# Altium PCB RD.PcbDoc (part 2 of 2)
Units mm, origin at the board's own origin, x right, y up, seen from the top; angles counter-clockwise.
Board outline 101.86 x 119 mm, 4 copper layers (Top Layer, VCC, GND, Bottom Layer); 150 components, 96 nets, 593 pads, 207 vias.
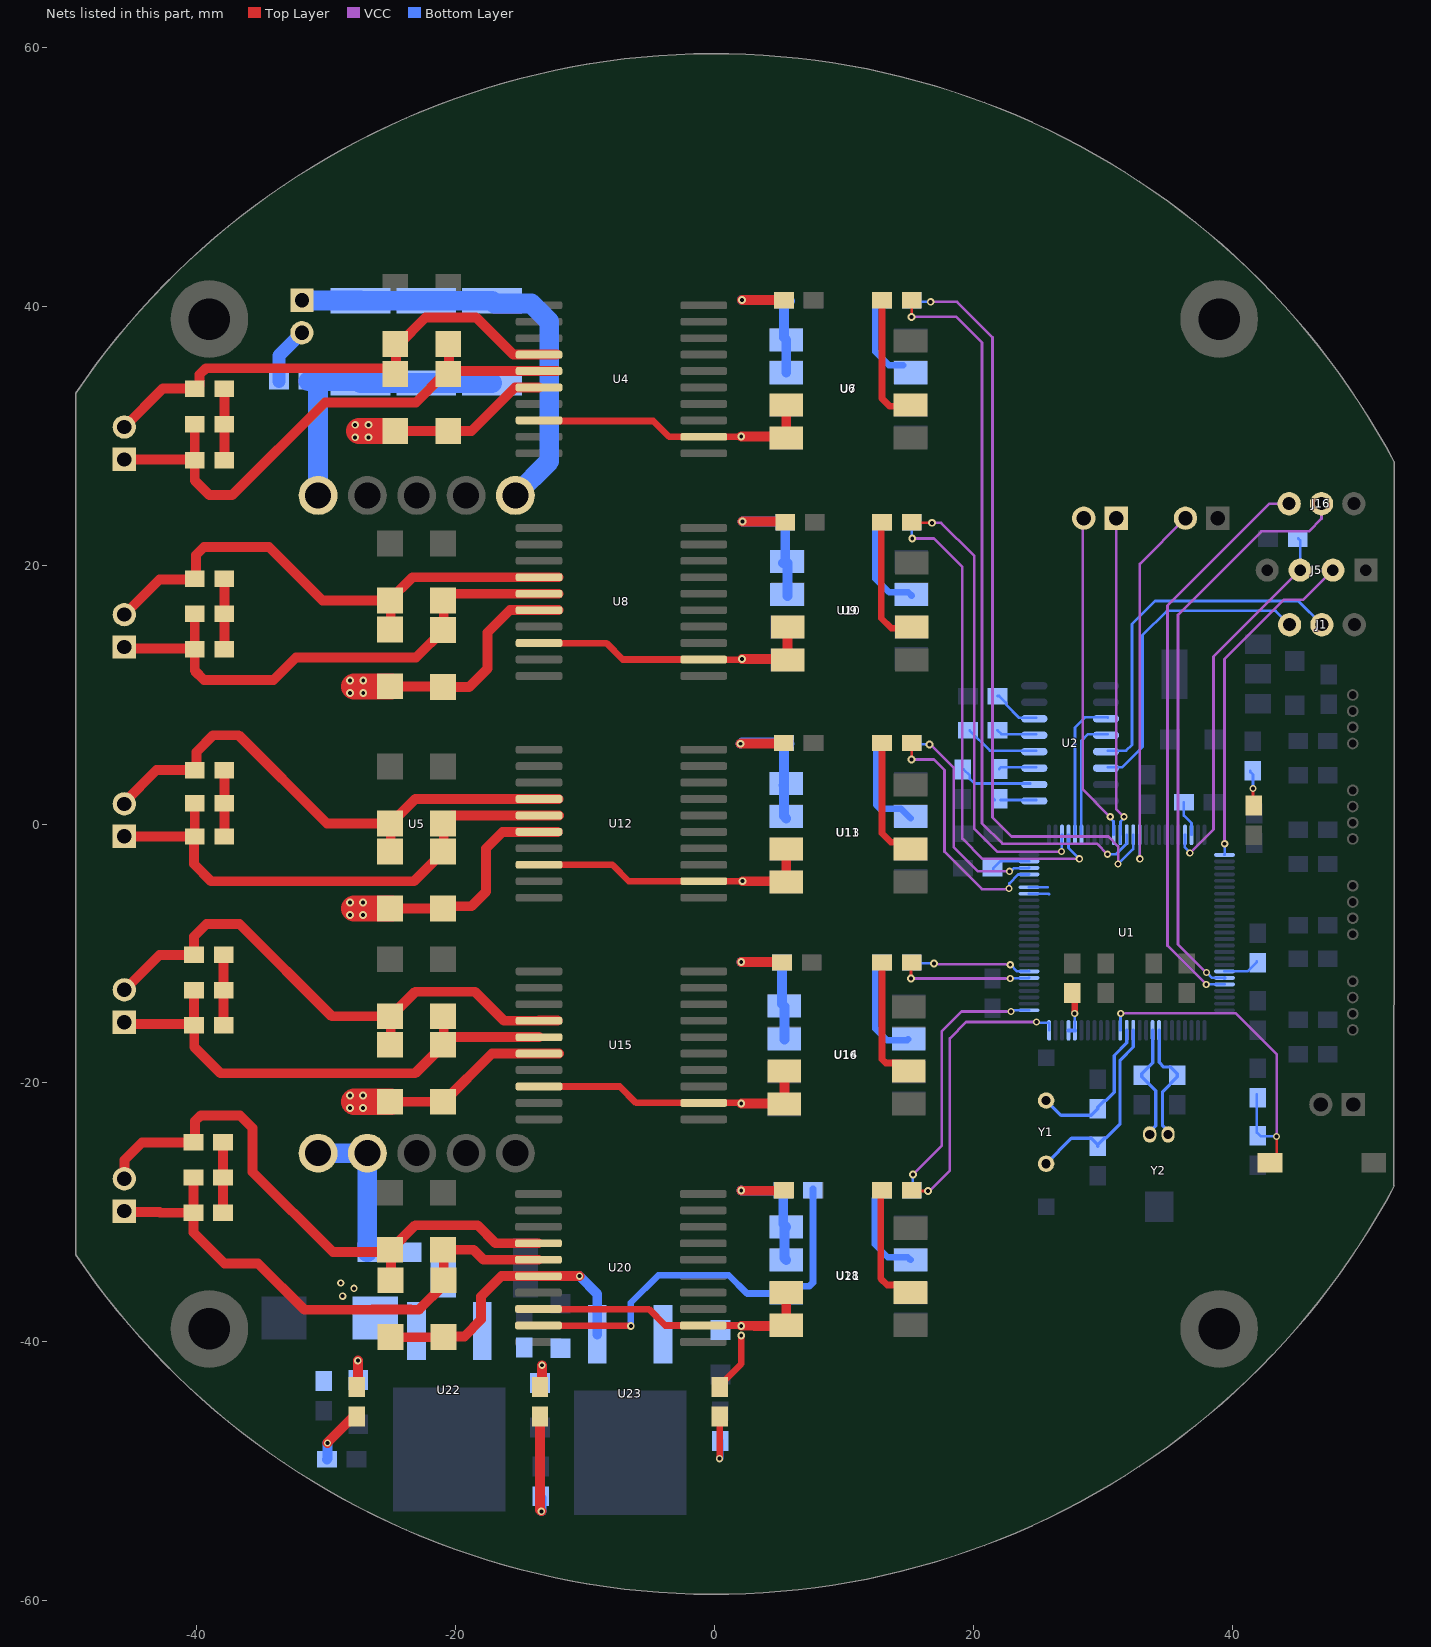
[diagram p4: the nets of this part, all layers, seen from the top]

## Via types
v1: diameter 0.559, hole 0.305, Top Layer to Bottom Layer, 135 vias
v2: diameter 0.61, hole 0.305, Top Layer to Bottom Layer, 72 vias

## Nets (pads, with @x,y where several pads share a name; then routed paths per layer and width w, separated by ;. In a path a pad name is that pad's centre, name@x,y a point inside that pad or via, vN(x,y) a via of type N, cw(c..) or ccw(c..) an arc to the next point about the centre after c; other vN are vias at no path point) (continued)
IN10: R36.2 U20.9 U21.6 | length 32
  Top Layer w0.508: U20.9@-13.581,-38.737 -13.569,-38.749 -6.463,-38.749 v2(-6.452,-38.76)
  Bottom Layer w0.508: v2(-6.452,-38.76) -6.452,-36.982 -4.318,-34.849 1.118,-34.849 2.533,-36.264 U21.6@5.559,-36.264 ; U21.6@5.559,-36.213 6.056,-35.716 7.322,-35.716 7.62,-35.418 R36.2@7.62,-28.16
INPUT1: R13.1 U1.63 | length 57.8
  Top Layer w0.203: v2(15.24,39.167) 15.24,39.965 R13.1@15.54,40.265
  VCC w0.203: v2(15.24,39.167) 18.694,39.167 20.676,37.186 20.676,0.051 22.25,-1.524 29.566,-1.524 v1(30.378,-2.337)
  Bottom Layer w0.203: v1(30.378,-2.337) 31.007,-2.337 31.857,-1.487 U1.63@31.857,-0.837
INPUT2: R16.1 U1.64 | length 59.4
  VCC w0.203: v1(16.713,40.335) 18.745,40.335 21.488,37.592 21.488,0.508 22.962,-0.965 30.429,-0.965 31.191,-1.727 v1(31.191,-3.099)
  Bottom Layer w0.203: R16.1@15.083,40.388 15.135,40.335 v1(16.713,40.335) ; v1(31.191,-3.099) 32.357,-1.933 U1.64@32.357,-0.837
INPUT3: R18.1 U1.53 | length 35.8
  Top Layer w0.203: R18.1@15.184,23.297 15.215,23.266 v2(16.815,23.266)
  VCC w0.203: v2(16.815,23.266) 17.526,23.266 20.066,20.726 20.066,-0.356 21.844,-2.134 v1(26.822,-2.134)
  Bottom Layer w0.203: v1(26.822,-2.134) 26.84,-2.116 26.84,-0.855 U1.53@26.857,-0.837
INPUT4: R21.1 U1.54 | length 38.9
  VCC w0.203: v2(15.291,22.047) 16.967,22.047 19.152,19.863 19.152,-1.118 20.726,-2.692 v1(28.194,-2.692)
  Bottom Layer w0.203: v2@15.24,22.047 R21.1@15.24,23.322 ; U1.54@27.357,-0.837 27.357,-1.855 v1(28.194,-2.692)
INPUT5: R23.1 U1.47 | length 18.9
  Top Layer w0.203: R23.1@15.21,6.257 15.24,6.226 v2(15.24,4.978)
  VCC w0.203: v2(15.24,4.978) 16.967,4.978 17.78,4.166 17.78,-2.132 20.676,-5.028 22.709,-5.028 v1(22.758,-4.978)
  Bottom Layer w0.203: v1(22.758,-4.978) 22.79,-4.946 22.79,-4.591 23.476,-3.906 24.288,-3.906 U1.47@24.307,-3.887
INPUT6: R26.1 U1.48 | length 17
  VCC w0.203: v2(16.612,6.147) 16.713,6.147 18.491,4.369 18.491,-1.778 20.371,-3.658 v1(22.809,-3.658)
  Bottom Layer w0.203: R26.1@15.083,6.257 15.193,6.147 v2(16.612,6.147) ; v1(22.809,-3.658) 22.905,-3.658 23.157,-3.406 24.288,-3.406 U1.48@24.307,-3.387
INPUT7: R28.1 U1.31 | length 10.4
  Top Layer w0.203: v2(15.189,-11.938) R28.1@15.189,-10.724
  VCC w0.203: v2(15.189,-11.938) v1(22.86,-11.938)
  Bottom Layer w0.203: v1(22.86,-11.938) 22.892,-11.906 24.288,-11.906 U1.31@24.307,-11.887
INPUT8: R31.1 U1.32 | length 9.3
  VCC w0.203: v2(16.967,-10.77) 17.018,-10.82 22.809,-10.82 v1(22.86,-10.871)
  Bottom Layer w0.203: R31.1@15.342,-10.724 15.387,-10.77 v2(16.967,-10.77) ; v1(22.86,-10.871) 23.376,-11.387 U1.32@24.307,-11.387 U1.32@24.275,-11.356
INPUT9: R35.1 U1.25 | length 22.5
  Top Layer w0.203: R35.1@15.24,-28.279 15.307,-28.346 v2(16.51,-28.346)
  VCC w0.203: v2@16.624,-28.334 18.186,-26.772 18.186,-16.561 19.456,-15.291 v1(24.892,-15.291)
  Bottom Layer w0.203: v1@24.943,-15.24 25.043,-15.34 25.812,-15.34 25.857,-15.384 U1.25@25.857,-15.937
INPUT10: R37.1 U1.26 | length 20.6
  VCC w0.203: v2(15.342,-27.076) 17.577,-24.841 17.577,-16.002 19.101,-14.478 v1(22.911,-14.478)
  Bottom Layer w0.203: R37.1@15.162,-28.194 15.342,-28.014 v2(15.342,-27.076) ; v1(22.911,-14.478) 23.007,-14.478 23.098,-14.387 U1.26@24.307,-14.387
INPUT_CeTui1: J16.2 U1.95 | length 45.4
  VCC w0.203: v1(38.008,-11.471) 37.989,-11.471 35.814,-9.296 35.814,16.154 42.266,22.606 45.923,22.606 46.899,23.582 J16.2@46.899,24.74
  Bottom Layer w0.203: v1(38.008,-11.471) 38.039,-11.471 38.456,-11.887 U1.95@39.407,-11.887
  Bottom Layer w0.305: U1.95@39.404,-11.885 U1.95@39.407,-11.887
INPUT_CeTui2: J16.3 U1.96 | length 44.5
  VCC w0.203: v1(37.998,-12.395) 35.001,-9.398 35.001,16.866 42.875,24.74 J16.3@44.348,24.74
  Bottom Layer w0.203: v1@38.049,-12.395 38.053,-12.391 39.403,-12.391 U1.96@39.407,-12.387
INPUT_CeTui3: U1.44 | length 1.6
  Bottom Layer w0.203: U1.44@24.307,-5.387 25.809,-5.387 25.857,-5.436
INPUT_CeTui4: U1.45 | length 1.5
  Bottom Layer w0.203: U1.45@24.307,-4.887 24.317,-4.877 25.756,-4.877
INPUT_DuoJi1: J18.2 U1.61 | length 25.4
  VCC w0.203: J18.2@28.448,23.52 28.448,2.692 v1(30.582,0.559)
  Bottom Layer w0.203: v1(30.582,0.559) 30.582,0.463 30.838,0.206 30.838,-0.819 U1.61@30.857,-0.837
INPUT_DuoJi2: J18.1 U1.62 | length 25.5
  VCC w0.203: J18.1@31.039,23.622 31.039,1.168 v1(31.648,0.559)
  Bottom Layer w0.203: U1.62@31.357,-1.487 U1.62@31.357,-0.837 31.375,-0.819 31.375,0.189 31.648,0.463 v1(31.648,0.559)
INPUT_ZhuTui: J17.2 U1.65 | length 29.6
  VCC w0.203: v1(32.868,-2.692) 32.868,20.097 J17.2@36.393,23.622
  Bottom Layer w0.203: U1.65@32.857,-0.837 32.862,-0.843 32.862,-2.687 v1(32.868,-2.692)
NetC8_2: C8.2 U1.49 | length 3.1
  Bottom Layer w0.203: C8.2@21.539,-3.505 21.539,-3.421 22.073,-2.887 U1.49@24.307,-2.887
NetC9_2: C9.2 U1.73 | length 2.8
  Bottom Layer w0.203: C9.2@36.271,1.676 36.271,0.66 36.857,0.075 U1.73@36.857,-0.837
NetC11_1: C11.1 U2.3 | length 2.9
  Bottom Layer w0.203: C11.1@22.005,4.243 22.158,4.396 U2.3@24.853,4.396
NetC11_2: C11.2 U2.1 | length 2.9
  Bottom Layer w0.203: C11.2@21.548,1.957 C11.2@21.649,1.856 ; C11.2@22.106,1.856 U2.1@24.853,1.856
NetC14_1: C14.1 U2.2 | length 5.7
  Bottom Layer w0.203: C14.1@19.253,4.216 19.736,3.734 19.736,3.48 20.089,3.126 U2.2@24.396,3.126
NetC19_1: C19.1 U2.5 | length 3.1
  Bottom Layer w0.203: C19.1@21.878,7.241 22.182,6.936 U2.5@24.853,6.936
NetC19_2: C19.2 U2.4 | length 5.8
  Bottom Layer w0.203: C19.2@19.719,7.241 21.293,5.666 U2.4@24.853,5.666
NetC20_2: C20.2 U2.6 | length 3.7
  Bottom Layer w0.203: C20.2@21.878,9.882 22.005,9.882 22.538,9.349 22.538,9.222 23.554,8.206 U2.6@24.853,8.206
NetC23_1: C23.1 C24.1 C25.1 F1.2 U5.1 | length 22.3
  Bottom Layer w1.524: F1.2@-31.344,34.188 -27.457,34.188 C25.1@-27.33,34.061 C24.1@-22.25,34.061 C23.1@-17.17,34.061 ; U5.1@-30.607,25.375 -30.607,33.452
NetC23_2: C23.2 C24.2 C25.2 J9.1 U5.5 | length 34.3
  Bottom Layer w1.524: J9.1@-31.852,40.447 -31.834,40.429 -27.348,40.429 C25.2@-27.33,40.411 C24.2@-22.25,40.411 C23.2@-17.17,40.411 -16.957,40.198 -14.138,40.198 -12.751,38.811 -12.751,28.021 -15.367,25.405 U5.5@-15.367,25.375
NetDS1_2: DS1.2 DS2.1 R14.1 | length 5.6
  Top Layer w0.762: DS1.2@-37.897,28.042 DS1.2@-37.846,28.092 DS2.1@-37.846,30.861 R14.1@-37.846,33.63
NetDS3_2: DS3.2 DS4.1 R19.1 | length 5.5
  Top Layer w0.762: R19.1@-37.897,18.898 -37.846,18.847 DS4.1@-37.846,16.231 DS3.2@-37.846,13.513 ; R19.1@-37.744,18.898 R19.1@-37.668,18.821
NetDS5_2: DS5.2 DS6.1 R25.1 | length 5.2
  Top Layer w0.762: DS5.2@-37.897,-1.016 DS5.2@-37.846,-0.965 DS6.1@-37.846,1.6 R25.1@-37.846,4.166
NetDS7_2: DS7.2 DS8.1 R32.1 | length 5.4
  Top Layer w0.762: DS7.2@-37.897,-15.494 DS8.1@-37.897,-12.827 R32.1@-37.897,-10.109
NetDS9_2: DS9.2 DS10.1 R38.1 | length 5.5
  Top Layer w0.762: DS9.2@-37.948,-30.023 DS10.1@-37.948,-27.305 -37.948,-24.638 R38.1@-37.846,-24.536
NetF1_1: F1.1 J9.2 | length 4.5
  Bottom Layer w1.016: F1.1@-33.63,34.188 -33.63,36.17 J9.2@-31.852,37.948
NetF2_1: F2.1 U5.9 U5.10 | length 11.5
  Bottom Layer w1.524: U5.10@-30.607,-25.425 U5.9@-26.797,-25.425 F2.1@-26.797,-33.071
NetLED1_1: LED1.1 R4.1 | length 3.4
  Top Layer w0.203: LED1.1@41.554,0.813 41.554,1.219 41.605,1.27 v1(41.605,2.743)
  Bottom Layer w0.203: R4.1@41.402,4.115 41.402,4.013 41.605,3.81 v1(41.605,2.743)
NetLED2_2: LED2.2 R29.1 | length 4.6
  Top Layer w0.762: v1(-29.87,-47.803) -29.87,-47.777 -27.635,-45.542 LED2.2@-27.635,-45.415
  Bottom Layer w0.762: R29.1@-29.921,-49.073 -29.87,-49.022 v1(-29.87,-47.803)
NetLED3_2: LED3.2 R41.1 | length 8.5
  Top Layer w0.762: LED3.2@-13.462,-45.771 -13.462,-52.984 v1(-13.36,-53.086)
  Bottom Layer w0.762: R41.1@-13.462,-51.968 -13.36,-52.07 v1(-13.36,-53.086)
NetLED4_2: LED4.2 R42.1 | length 4.6
  Top Layer w0.508: v1(0.406,-49.022) LED4.2@0.406,-45.771
  Bottom Layer w0.508: v1(0.406,-49.022) 0.406,-49.008 0.445,-48.97 R42.1@0.445,-47.65
NetR2_1: R2.1 U1.94 | length 2.8
  Bottom Layer w0.203: U1.94@39.407,-11.387 41.165,-11.387 41.91,-10.643 R2.1@41.91,-10.617
NetR13_2: R13.2 U6.2 | length 10.1
  Top Layer w0.508: R13.2@12.954,40.438 12.954,32.868 13.564,32.258 15.065,32.258 U6.2@15.159,32.352
NetR16_2: R16.2 U7.2 | length 6.8
  Bottom Layer w0.508: R16.2@12.954,40.438 12.827,40.438 12.446,40.057 12.446,36.474 13.487,35.433 U7.2@14.581,35.433
NetR18_2: R18.2 U9.2 | length 10.1
  Top Layer w0.508: R18.2@12.898,23.297 12.898,15.898 13.665,15.131 U9.2@15.261,15.131
NetR21_2: R21.2 U10.2 | length 8
  Bottom Layer w0.508: R21.2@12.954,23.322 12.827,23.322 12.446,22.941 12.446,18.948 13.497,17.897 14.984,17.897 U10.2@15.261,17.62
NetR23_2: R23.2 U11.2 | length 9.7
  Top Layer w0.508: R23.2@12.954,6.257 12.954,-0.711 13.646,-1.403 14.523,-1.403 U11.2@15.159,-2.039
NetR26_2: R26.2 U13.2 | length 8.1
  Bottom Layer w0.508: R26.2@12.954,6.257 12.878,6.257 12.497,5.876 12.497,1.489 12.794,1.192 14.405,1.192 U13.2@15.16,0.437
NetR28_2: R28.2 U14.2 | length 9.9
  Top Layer w0.508: R28.2@12.954,-10.699 12.954,-18.166 13.252,-18.463 14.379,-18.463 U14.2@15.015,-19.099
NetR31_2: R31.2 U16.2 | length 8.3
  Bottom Layer w0.508: R31.2@12.954,-10.699 12.446,-11.207 12.446,-15.799 13.346,-16.699 14.899,-16.699 U16.2@14.986,-16.612
NetR35_2: R35.2 U18.2 | length 9.7
  Top Layer w0.508: R35.2@12.848,-28.143 12.848,-35.098 13.36,-35.611 14.696,-35.611 U18.2@15.21,-36.124
NetR37_2: R37.2 U21.2 | length 7.8
  Bottom Layer w0.508: R37.2@12.954,-28.279 12.827,-28.279 12.446,-28.66 12.446,-28.907 12.395,-28.958 12.395,-32.461 13.395,-33.461 14.947,-33.461 U21.2@15.159,-33.673
OSC32IN: C17.2 U1.8 Y2.1 | length 9.6
  Bottom Layer w0.254: U1.8@34.357,-15.937 34.357,-18.406 34.722,-18.771 35.255,-18.771 35.763,-19.279 C17.2@35.763,-19.406 35.763,-19.533 34.62,-20.676 34.62,-23.321 35.052,-23.753 Y2.1@35.052,-23.978
OSC32OUT: C18.2 U1.9 Y2.2 | length 9
  Bottom Layer w0.254: Y2.2@33.63,-23.978 33.63,-23.778 34.087,-23.321 34.087,-20.599 33.02,-19.533 C18.2@33.02,-19.406 33.02,-19.279 33.857,-18.442 U1.9@33.857,-15.937
OSCIN: C15.2 U1.12 Y1.1 | length 15.3
  Bottom Layer w0.254: Y1.1@25.629,-26.241 27.588,-24.282 29.108,-24.282 29.616,-24.79 C15.2@29.616,-24.892 29.616,-24.765 30.124,-24.257 30.251,-24.257 31.344,-23.165 31.344,-18.237 32.357,-17.224 U1.12@32.357,-15.937
OSCOUT: C16.2 U1.13 Y1.2 | length 11.7
  Bottom Layer w0.254: Y1.2@25.629,-21.361 26.772,-22.504 29.108,-22.504 C16.2@29.616,-21.996 29.616,-21.869 30.124,-21.361 30.251,-21.361 30.886,-20.726 30.886,-17.882 31.857,-16.911 U1.13@31.857,-15.937
OUT1: D1.2 D3.1 J10.2 R14.2 U4.4 | length 39.8
  Top Layer w0.762: J10.2@-45.568,30.663 -42.601,33.63 R14.2@-40.513,33.63 ; R14.2@-40.132,33.63 -40.005,33.63 -39.751,33.884 -39.751,34.722 -39.268,35.204 -25.029,35.204 -24.587,34.763 D3.1@-24.587,37.069 ; D3.1@-24.406,37.018 -22.307,39.116 -18.39,39.116 -15.529,36.255 U4.4@-13.542,36.255 U4.4@-12.141,36.255
OUT2: D2.2 D4.1 DS1.1 DS2.2 J10.1 U4.5 | length 43.4
  Top Layer w0.762: J10.1@-45.568,28.163 DS1.1@-40.372,28.163 ; DS1.1@-40.132,28.092 -40.132,26.518 -39.014,25.4 -37.238,25.4 -30.075,32.563 -23.049,32.563 D2.2@-20.9,34.712 ; DS2.2@-40.132,30.861 -40.132,28.143 DS1.1@-40.081,28.092 ; D4.1@-20.9,36.685 D4.1@-20.523,37.062 ; D2.2@-20.555,34.985 U4.5@-13.542,34.985 U4.5@-12.141,34.985 ; D2.2@-20.494,35.382 D4.1@-20.494,36.736
OUT3: D5.2 D7.1 J11.2 R19.2 U8.4 | length 41.6
  Top Layer w0.762: J11.2@-45.568,16.172 -42.842,18.898 -40.03,18.898 -40.03,20.777 -39.421,21.387 -34.392,21.387 -30.26,17.256 D7.1@-25.125,17.256 ; D5.2@-24.994,15.037 -24.994,17.256 D7.1@-25.125,17.256 ; U8.4@-12.04,19.055 U8.4@-13.542,19.055 -23.325,19.055 D7.1@-25.125,17.256
OUT4: D6.2 D8.1 DS3.1 DS4.2 J11.1 U8.5 | length 41.7
  Top Layer w0.508: D6.2@-21.031,15.342 D6.2@-21.002,15.371
  Top Layer w0.762: J11.1@-45.568,13.673 -45.448,13.553 -40.731,13.553 DS3.1@-40.564,13.721 ; DS4.2@-40.132,16.231 -40.132,11.836 -39.421,11.125 -34.036,11.125 -32.309,12.852 -23.034,12.852 -20.9,14.986 D8.1@-20.9,17.256 ; D8.1@-20.828,17.785 U8.5@-13.542,17.785 U8.5@-12.04,17.785
OUT5: D9.2 D11.1 J12.2 R25.2 U12.4 | length 42.3
  Top Layer w0.762: J12.2@-45.568,1.682 -43.084,4.166 -40.005,4.166 -40.005,5.563 -38.71,6.858 -36.728,6.858 -29.905,0.034 D11.1@-24.994,0.034 ; D9.2@-24.994,-2.134 D11.1@-24.994,0.034 ; U12.4@-12.04,1.93 U12.4@-13.542,1.93 -23.098,1.93 D11.1@-24.994,0.034
OUT6: D10.2 D12.1 DS5.1 DS6.2 J12.1 U12.5 | length 42.1
  Top Layer w0.762: J12.1@-45.553,-0.96 DS5.1@-40.336,-0.96 ; DS5.1@-40.132,-0.965 DS6.2@-40.132,1.6 DS6.2@-40.132,1.626 ; DS5.1@-40.081,-1.016 -40.183,-1.118 -40.183,-3.099 -38.862,-4.42 -23.186,-4.42 -20.9,-2.134 D12.1@-20.9,-0.016 ; D12.1@-20.9,0.034 D12.1@-20.9,-0.016 ; U12.5@-11.989,0.66 U12.5@-13.542,0.66 -20.224,0.66 D12.1@-20.9,-0.016
OUT7: D13.2 D15.1 J14.2 R32.2 U15.4 | length 43.3
  Top Layer w0.762: J14.2@-45.549,-12.791 J14.2@-45.568,-12.809 -42.868,-10.109 R32.2@-40.183,-10.109 -40.183,-8.687 -39.218,-7.722 -36.678,-7.722 -29.549,-14.85 D15.1@-24.994,-14.85 ; D13.2@-24.994,-17.053 D15.1@-24.994,-14.85 ; U15.4@-12.09,-15.189 -13.536,-15.189 U15.4@-13.542,-15.195 -16.251,-15.195 -18.491,-12.954 -23.098,-12.954 D15.1@-24.994,-14.85
OUT8: D14.2 D16.1 DS7.1 DS8.2 J14.1 U15.5 | length 40.2
  Top Layer w0.762: J14.1@-45.568,-15.309 -45.424,-15.452 DS7.1@-40.485,-15.452 ; DS8.2@-40.183,-12.827 -40.183,-15.788 -40.172,-15.799 -40.172,-17.232 -38.151,-19.253 -34.995,-19.253 ; -34.849,-19.253 -23.1,-19.253 -20.9,-17.053 D16.1@-20.9,-14.85 ; D14.2@-20.875,-17.058 -20.281,-16.465 U15.5@-13.542,-16.465
OUT9: D18.2 D20.1 J15.2 R38.2 U20.4 | length 45.7
  Top Layer w0.762: J15.2@-45.568,-27.401 J15.2@-45.568,-27.178 ; -45.568,-25.959 J15.2@-45.568,-27.178 ; -45.517,-25.908 -44.196,-24.587 R38.2@-40.234,-24.587 ; J15.2@-45.415,-27.33 J15.2@-45.568,-27.178 ; R38.2@-40.117,-24.486 -40.117,-22.951 -39.671,-22.504 -36.627,-22.504 -35.662,-23.47 -35.662,-26.873 -29.464,-33.071 -24.943,-33.071 -24.968,-33.096 -24.968,-35.214 D18.2@-24.943,-35.24 ; D20.1@-24.994,-32.883 -23.099,-30.988 -18.288,-30.988 -16.889,-32.387 U20.4@-13.581,-32.387
OUT10: D19.2 D21.1 DS9.1 DS10.2 J15.1 U20.5 | length 42.8
  Top Layer w0.762: J15.1@-45.568,-29.901 -45.517,-29.952 J15.1@-45.517,-29.921 ; J15.1@-45.415,-29.921 -45.364,-29.972 -42.853,-29.972 -42.802,-30.023 DS9.1@-40.234,-30.023 ; DS10.2@-40.234,-27.305 DS9.1@-40.234,-30.023 ; D21.1@-20.9,-33.274 -20.9,-35.595 -22.82,-37.515 -23.451,-37.515 -23.469,-37.496 -26.416,-37.496 -26.435,-37.515 -31.675,-37.515 -35.255,-33.934 -37.846,-33.934 -40.234,-31.547 DS9.1@-40.234,-30.023 ; D21.1@-20.568,-33.274 D21.1@-20.959,-32.883 -18.603,-32.883 -17.83,-33.657 U20.5@-13.581,-33.657
RST: C21.1 K1.1 R3.1 U1.14 | length 27.7
  Top Layer w0.203: K1.1@43.317,-26.205 43.434,-26.088 v1(43.434,-24.13)
  VCC w0.203: v1(31.394,-14.63) 40.284,-14.63 43.434,-17.78 v1(43.434,-24.13)
  Bottom Layer w0.203: U1.14@31.357,-15.937 31.375,-15.919 31.375,-14.65 v1(31.394,-14.63) ; R3.1@41.91,-20.879 41.91,-23.825 42.215,-24.13 v1(43.434,-24.13)
RXA: J1.2 U2.13 | length 27.5
  Bottom Layer w0.203: U2.13@30.391,5.666 31.81,5.666 32.258,6.114 32.258,15.443 34.036,17.221 45.104,17.221 J1.2@46.933,15.392
RXD: U1.56 U2.12 | length 9.5
  Bottom Layer w0.203: U1.56@28.357,-0.837 28.357,6.411 28.882,6.936 U2.12@30.391,6.936
SWCLK: J5.2 U1.76 | length 26.4
  VCC w0.203: v1(39.421,-1.524) 39.404,-1.507 39.404,12.734 43.993,17.323 45.5,17.323 J5.2@47.786,19.609
  Bottom Layer w0.203: U1.76@39.407,-2.387 39.421,-2.373 v1(39.421,-1.524)
SWDIO: J5.3 R11.1 U1.72 | length 29.4
  VCC w0.203: v1(36.728,-2.235) 38.557,-0.406 38.557,12.92 J5.3@45.246,19.609
  Bottom Layer w0.203: U1.72@36.357,-0.837 36.357,-1.515 36.34,-1.532 36.34,-1.798 36.728,-2.187 v1(36.728,-2.235) ; R11.1@45.11,22.047 45.246,21.912 J5.3@45.246,19.609
TXA: J1.3 U2.14 | length 24.5
  Bottom Layer w0.203: U2.14@30.391,4.396 30.398,4.389 31.285,4.389 31.292,4.396 31.524,4.396 33.071,5.944 33.071,14.58 34.95,16.459 43.365,16.459 J1.3@44.432,15.392
TXD: U1.55 U2.11 | length 11.2
  Bottom Layer w0.203: U1.55@27.857,-0.837 27.857,7.454 28.635,8.232 30.366,8.232 U2.11@30.391,8.206
VCC_5V: C32.1 LED4.1 R12.1 R15.1 R17.1 R20.1 R22.1 R24.1 R27.1 R30.1 R34.1 R36.1 U4.8 U4.12 U6.7 U6.8 U7.7 U7.8 U8.8 U8.12 U9.7 U9.8 U10.7 U10.8 U11.7 U11.8 U12.8 U12.12 U13.7 U13.8 U14.7 U14.8 U15.8 U15.12 U16.7 U16.8 U18.7 U18.8 U20.8 U20.12 U21.7 U21.8 U23.3 | length 177.8
  Top Layer w0.508: U20.8@-13.581,-37.467 -5.053,-37.467 -3.783,-38.737 2.032,-38.737 2.055,-38.76 v2(2.083,-38.76) ; U15.8@-13.542,-20.275 -7.31,-20.275 -6.04,-21.545 2.01,-21.545 2.055,-21.59 v2(2.083,-21.59) ; U12.8@-13.542,-3.15 -7.874,-3.15 -6.604,-4.42 v2(2.184,-4.42) ; U8.8@-13.542,13.975 -8.337,13.975 -7.067,12.705 U8.12@-0.82,12.705 ; U4.8@-13.496,31.129 -4.713,31.129 -3.489,29.905 U4.12@-1.269,29.905 ; U4.12@-1.269,29.913 -0.82,29.913 2.075,29.913 v2(2.083,29.921) ; U4.12@-0.82,29.905 U4.12@-0.812,29.913 ; U8.12@-0.812,12.703 2.058,12.703 2.106,12.751 v2(2.134,12.751) ; LED4.1@0.686,-43.104 2.083,-41.707 v2(2.083,-39.522)
  Top Layer w0.762: v2(2.032,6.198) 2.04,6.206 R22.1@5.377,6.206 ; v2(2.083,-38.76) 3.109,-38.76 3.116,-38.768 U18.8@5.559,-38.768 ; v2(2.083,-28.296) 2.117,-28.33 R34.1@5.377,-28.33 ; v2(2.083,-21.59) U14.8@5.35,-21.59 ; v2(2.083,-10.668) R27.1@5.152,-10.668 ; v2(2.083,29.921) 5.45,29.921 U6.8@5.559,29.812 U6.7@5.559,32.352 ; v2(2.134,12.751) 5.577,12.751 U9.8@5.661,12.667 U9.7@5.661,15.131 ; v2(2.134,40.488) R12.1@5.208,40.488 ; v2(2.184,-4.42) 5.443,-4.42 U11.8@5.501,-4.478 ; v2(2.184,23.368) 5.433,23.368 R17.1@5.479,23.322 ; U18.7@5.146,-35.814 5.559,-36.228 U18.8@5.559,-38.717 ; U14.8@5.415,-21.623 U14.7@5.415,-19.083 ; U11.8@5.559,-4.478 U11.7@5.559,-1.938
  Bottom Layer w0.762: v2(2.032,6.198) 2.134,6.299 5.276,6.299 5.377,6.198 R24.1@5.826,6.198 ; v2(2.083,-28.296) 2.117,-28.33 5.276,-28.33 R36.1@5.326,-28.279 ; v2(2.083,-10.668) 5.304,-10.668 5.233,-10.739 5.233,-13.913 5.416,-14.096 U16.7@5.416,-16.636 ; v2(2.134,40.488) 5.276,40.488 5.377,40.386 R15.1@5.842,40.386 ; v2(2.184,23.368) 5.283,23.368 R20.1@5.385,23.266 ; U10.8@5.296,20.16 5.479,20.343 R20.1@5.479,23.223 ; U13.8@5.357,2.997 U13.8@5.377,2.977 ; R24.1@5.377,6.257 U13.8@5.377,2.977 ; R15.1@5.377,40.437 5.377,37.577 5.56,37.394 U7.7@5.56,34.854 ; U21.8@5.428,-31.133 5.428,-33.542 U21.7@5.559,-33.673 ; R36.1@5.453,-28.406 5.326,-28.533 5.326,-30.901 U21.8@5.559,-31.133 ; U13.7@5.56,0.437 5.377,0.62 U13.8@5.377,2.977 ; U10.8@5.63,20.129 5.661,20.16 U10.7@5.661,17.62
VCC_12V: C28.2 C30.1 C31.1 D18.1 D19.1 LED3.1 U20.6 U22.3 U23.1 | length 24.3
  Top Layer w0.762: D18.1@-24.943,-39.639 D19.1@-20.85,-39.639 ; D19.1@-20.834,-39.624 -20.783,-39.573 -19.304,-39.573 -18.009,-38.278 -18.009,-36.5 -16.435,-34.927 U20.6@-13.581,-34.927 v1(-10.414,-34.927) ; LED3.1@-13.462,-43.485 -13.31,-43.332 v1(-13.31,-41.808)
  Bottom Layer w0.762: v1(-10.414,-34.927) -9.042,-36.298 U23.1@-9.042,-39.421
VCC_24V: C26.1 C27.2 C29.1 D1.1 D2.1 D5.1 D6.1 D9.1 D10.1 D13.1 D14.1 F2.2 LED2.1 TVS1.2 U4.6 U8.6 U12.6 U15.6 U22.1 | length 74.8
  Top Layer w0.762: LED2.1@-27.635,-43.485 -27.534,-43.383 v1(-27.534,-41.453) ; D13.1@-24.994,-21.453 -20.9,-21.453 -17.182,-17.735 U15.6@-13.542,-17.735 -13.536,-17.729 U15.6@-11.989,-17.729 ; D9.1@-24.994,-6.533 -20.9,-6.533 -20.717,-6.35 -18.745,-6.35 -17.628,-5.232 -17.628,-1.88 -16.358,-0.61 U12.6@-13.542,-0.61 U12.6@-12.09,-0.61 ; D5.1@-24.994,10.637 -24.981,10.624 -24.968,10.612 -20.926,10.612 -20.9,10.586 -18.929,10.586 -17.526,11.989 -17.526,14.783 -15.793,16.515 U8.6@-13.542,16.515 U8.6@-12.04,16.515 ; D1.1@-24.587,30.363 -18.761,30.363 -15.408,33.715 U4.6@-13.542,33.715
  Top Layer w2.032: -27.823,-21.453 D13.1@-24.994,-21.453 ; -27.823,-6.533 D9.1@-24.994,-6.533 ; -27.81,10.624 D5.1@-24.981,10.624 ; -27.417,30.363 D1.1@-24.587,30.363
  other v1: -28.702,-36.474 -27.838,-35.865 -28.854,-35.458
  other v2: -28.143,-21.946 -27.127,-21.946 -28.143,-20.98 -27.127,-20.98 -28.143,-7.026 -27.127,-7.026 -28.143,-6.061 -27.127,-6.061 -28.13,10.132 -27.114,10.132 -28.13,11.097 -27.114,11.097 -27.737,29.87 -26.721,29.87 -27.737,30.836 -26.721,30.836
VDD: R1.1 U1.21 U1.22 | length 3.4
  Top Layer w0.203: R1.1@27.737,-13.056 R1.1@27.838,-13.157
  Top Layer w0.508: v1(27.838,-14.63) R1.1@27.838,-13.157
  Bottom Layer w0.203: v1(27.838,-14.63) 27.848,-14.64 27.848,-15.928 U1.21@27.857,-15.937
  Bottom Layer w0.305: U1.22@27.357,-15.937 U1.21@27.857,-15.937
pads on no net: U1.1 U1.2 U1.3 U1.4 U1.5 U1.7 U1.15 U1.16 U1.17 U1.18 U1.29 U1.30 U1.33 U1.34 U1.35 U1.36 U1.37 U1.38 U1.39 U1.40 U1.41 U1.42 U1.43 U1.46 U1.51 U1.52 U1.57 U1.58 U1.59 U1.60 U1.66 U1.69 U1.70 U1.71 U1.77 U1.78 U1.79 U1.80 U1.81 U1.82 U1.83 U1.84 U1.85 U1.86 U1.87 U1.88 U1.89 U1.97 U1.98 U2.7 U2.8 U2.9 U2.10 U4.3 U4.13 U4.14 U4.15 U4.16 U4.17 U4.18 U5.2 U5.3 U5.4 U5.8 U6.1 U6.4 U7.1 U7.4 U8.3 U8.13 U8.14 U8.15 U8.16 U8.17 U8.18 U9.1 U9.4 U10.1 U10.4 U11.1 U11.4 U12.3 U12.13 U12.14 U12.15 U12.16 U12.17 U12.18 U13.1 U13.4 U14.1 U14.4 U15.3 U15.13 U15.14 U15.15 U15.16 U15.17 U15.18 U16.1 U16.4 U18.1 U18.4 U20.3 U20.13 U20.14 U20.15 U20.16 U20.17 U20.18 U21.1 U21.4 Y1. Y2.
copper on no net:
  other v1: 2.642,-56.744 12.344,-56.083 26.314,-48.87 26.314,-46.482 28.499,-46.482 31.953,-40.538 34.138,-38.151 -46.025,-20.726 -45.466,-6.248 -46.177,7.925 -45.618,34.9 36.474,43.434 -37.44,43.637 26.721,45.415 32.004,45.466 -28.702,48.412 26.67,48.666 -19.406,54.204 5.994,56.794 -5.791,57.201

## Polygon pours and split planes (outlines as drawn)
GND2 on GND "GND-GND2" (solid, remove dead copper, pour order 128): -28.603,-49.883 -25.095,-53.391 0.051,-53.391 8.839,-44.602 8.839,41.908 5.89,44.094 -25.311,44.094 -26.822,41.877 -26.822,-31.507 -26.827,-31.511 -35.408,-36.271 -35.269,-44.671 -28.603,-46.939
GND1 on GND "GND-GND1" (solid, pour order 160): 11.379,-38.329 13.123,-40.945 23.724,-40.945 32.809,-34.493 44.29,-34.493 52.023,-27.876 52.023,23.842 49.694,27.076 32.983,27.076 19.993,43.332 12.954,43.332 11.379,41.758
VCC_24V on VCC "VCC-VCC_24V" (solid, pour order 155): -36.678,-30.558 -30.221,-36.932 -27.737,-36.932 -27.076,-36.271 -27.076,-35.755 -27.914,-34.849 -29.87,-34.849 -34.562,-30.158 -34.562,-22.858 -34.138,-22.555 -26.96,-22.555 -26.42,-22.135 -26.42,-20.806 -26.859,-20.422 -34.138,-20.422 -34.562,-19.998 -34.562,-7.938 -34.138,-7.635 -26.96,-7.635 -26.42,-7.215 -26.42,-5.886 -26.859,-5.502 -34.138,-5.502 -34.562,-5.078 -34.562,9.21 -34.125,9.522 -26.948,9.522 -26.407,9.943 -26.407,11.272 -26.846,11.656 -34.125,11.656 -34.562,12.092 -34.562,27.227 -32.677,29.261 -26.554,29.261 -26.013,29.681 -26.013,31.01 -26.452,31.394 -33.477,31.394 -36.678,28.194
VCC_5V on VCC "VCC-VCC_5V" (solid, pour order 157): 1.676,-40.03 2.591,-40.03 2.997,-39.624 2.997,-38.557 2.692,-38.252 2.692,40.792 2.54,40.945 1.778,40.945 1.62,40.787 1.518,-39.872
GND2 on Bottom Layer "Bottom Layer-GND2" (solid, remove dead copper, pour order 142): -11.481,-50.952 -11.481,-52.941 -11.047,-53.455 -2.114,-53.528 -1.575,-53.124 -1.575,-47.396 -0.61,-46.431 1.047,-46.431 1.422,-45.766 1.422,-41.883 0.619,-40.894 -1.25,-40.894 -2.286,-43.514 -10.817,-43.481 -11.176,-43.891 -11.176,-45.385 -11.481,-45.801 -15.178,-45.801 -15.799,-45.419 -15.799,-43.514 -16.257,-43.18 -24.813,-43.18 -25.027,-43.456 -25.027,-44.857 -25.499,-45.568 -28.476,-45.568 -29.361,-44.501 -30.98,-44.501 -32.563,-43.588 -32.563,-40.686 -31.28,-39.962 -31.28,-36.647 -31.532,-36.265 -35.046,-36.265 -35.255,-36.474 -35.255,-44.616 -28.456,-47.203 -28.456,-49.911 -24.962,-53.34 -15.918,-53.34 -15.596,-53.043 -15.596,-51.149 -14.63,-50.546 -12.497,-50.546
VCC_24V on Bottom Layer "Bottom Layer-VCC_24V" (solid, pour order 148): -26.06,-41.605 -22.338,-41.605 -22.098,-41.417 -22.098,-36.972 -21.837,-36.711 -19.983,-36.711 -19.703,-36.487 -19.703,-32.069 -19.887,-31.783 -21.826,-31.783 -24.161,-31.783 -24.689,-32.472 -24.689,-34.138 -25.451,-34.9 -29.295,-34.9 -29.667,-35.459 -29.667,-36.648 -28.245,-37.199 -28.245,-41.25 -29.108,-42.113 -30.709,-42.113 -30.988,-42.418 -30.988,-43.688 -30.836,-43.84 -26.772,-43.84 -26.568,-43.637 -26.568,-42.113
VCC_5V on Bottom Layer "Bottom Layer-VCC_5V" (solid, pour order 144): -3.057,-40.159 -2.853,-40.03 2.591,-40.03 2.997,-39.624 2.997,-38.583 2.671,-38.202 -2.752,-38.202 -3.057,-37.897 -3.057,-37.236 -3.209,-37.084 -4.682,-37.084 -4.885,-37.287 -4.885,-41.632 -4.658,-41.859 -3.258,-41.859 -3.057,-41.587
VCC_12V on Bottom Layer "Bottom Layer-VCC_12V" (solid, pour order 146): -14.427,-43.84 -14.224,-44.044 -12.751,-44.044 -12.497,-43.863 -12.497,-42.362 -11.722,-41.758 -8.382,-41.758 -8.128,-41.504 -8.128,-37.338 -8.484,-36.982 -9.601,-36.982 -9.881,-37.262 -9.881,-39.091 -10.414,-39.624 -16.688,-39.624 -17.103,-38.883 -17.103,-37.014 -17.253,-36.789 -18.682,-36.789 -18.83,-36.938 -18.83,-41.332 -18.647,-41.561 -15.291,-41.561 -14.427,-42.187
GND2 on Bottom Layer "Bottom Layer-GND2 1" (solid, remove dead copper, pour order 119): -14.065,-39.028 -13.919,-38.794 -13.919,-38.1 -13.716,-37.897 -11.062,-37.897 -10.871,-37.724 -10.871,-36.348 -11.1,-36.119 -12.77,-36.119 -13.31,-35.558 -13.31,-24.372 -14.313,-23.368 -20.724,-23.368 -21.234,-23.8 -21.234,-27.349 -15.9,-31.27 -15.9,-36.644 -15.443,-36.98 -15.443,-38.837 -15.305,-39.028
GND1 on Top Layer "Top Layer-GND1" (solid, pour order 159): 11.43,-38.278 13.174,-40.894 23.775,-40.894 32.859,-34.442 44.34,-34.442 52.074,-27.825 52.074,23.892 49.745,27.127 33.034,27.127 20.044,43.383 13.005,43.383 11.43,41.808

## Other copper
Top Layer:
  pour cut-out: 46.736,-22.962 49.022,-22.851 49.022,-20.523 46.736,-20.371
  pour cut-out: 28.296,24.892 28.346,24.943 29.82,24.943 29.82,22.454 29.718,22.352 28.397,22.352
  pour cut-out: 36.322,24.943 37.592,24.943 37.795,24.74 37.795,22.504 37.621,22.33 36.393,22.33
  pour cut-out: 44.399,26.032 46.899,26.032 46.922,26.01 48.952,26.01 49.098,25.864 48.209,24.975 48.209,24.587 49.098,23.698 49.098,23.596 48.949,23.448 44.399,23.448
  pour cut-out: 42.706,20.89 49.045,20.89 49.183,20.752 49.183,18.466 49.045,18.328 42.706,18.328
  pour cut-out: 48.653,9.714 48.472,9.39 48.472,7.468 48.472,6.218 50.148,6.218 50.148,8.718 50.14,8.727 50.14,9.541 49.967,9.714
  pour cut-out: 48.653,2.343 48.472,2.019 48.472,-1.153 50.148,-1.153 50.148,2.162 49.967,2.343
  pour cut-out: 48.653,-5.028 48.472,-5.352 48.472,-8.524 50.148,-8.524 50.148,-5.209 49.967,-5.028
  pour cut-out: 48.653,-12.408 48.472,-12.732 48.472,-15.904 50.148,-15.904 50.148,-12.589 49.967,-12.408
  pour cut-out: 44.432,16.684 46.933,16.684 46.955,16.662 48.985,16.662 49.131,16.517 48.312,15.698 48.301,15.698 48.301,15.093 49.126,14.268 49.117,14.268 48.949,14.1 44.432,14.1
  pour cut-out: 32.918,-14.197 37.524,-14.197 38.7,-13.022 38.7,-10.582 38.527,-10.41 37.39,-10.41 37.264,-11.803 32.644,-11.803
  pour cut-out: 25.583,-13.885 25.586,-13.885 27.561,-11.911 31.242,-11.911 31.242,-13.568 31.971,-14.297 31.167,-15.101 28.277,-15.101 27.422,-15.957 24.892,-15.957 24.892,-15.047 24.559,-14.714 25.215,-14.058 25.285,-14.058
  pour cut-out: 44.235,-25.044 44.094,-24.028 42.926,-23.673 41.632,-25.044
  pour cut-out: 17.323,4.318 12.852,4.318 12.852,6.909 17.323,6.909
  pour cut-out: 17.221,-30.531 13.767,-30.531 13.767,-26.416 17.221,-26.416
  pour cut-out: 17.678,-13.36 13.208,-13.36 13.208,-10.058 17.678,-10.058
  pour cut-out: 17.526,21.336 14.376,21.336 14.376,23.978 17.526,23.978
  pour cut-out: 17.374,38.456 14.224,38.456 14.224,41.046 17.374,41.046
GND:
  pour cut-out: 32.715,-22.962 32.581,-30.785 36.119,-30.785 36.068,-23.165 35.865,-22.962 35.052,-22.962
  pour cut-out: 24.384,-17.17 22.657,-19.355 22.657,-28.042 24.384,-30.48 26.873,-30.48 27.838,-29.21 28.6,-28.194 28.55,-28.143 28.55,-18.593 26.873,-17.17
  pour cut-out: 28.296,24.892 28.346,24.943 29.82,24.943 29.82,22.454 29.718,22.352 28.397,22.352
  pour cut-out: 36.322,24.943 37.592,24.943 37.795,24.74 37.795,22.504 37.621,22.33 36.393,22.33
  pour cut-out: 44.399,26.032 46.899,26.032 46.922,26.01 48.952,26.01 49.098,25.864 48.209,24.975 48.209,24.587 49.098,23.698 49.098,23.596 48.949,23.448 44.399,23.448
  pour cut-out: 42.706,20.89 49.045,20.89 49.183,20.752 49.183,18.466 49.045,18.328 42.706,18.328
  pour cut-out: 44.432,16.684 46.933,16.684 46.955,16.662 48.985,16.662 49.131,16.517 48.312,15.698 48.301,15.698 48.301,15.093 49.126,14.268 49.117,14.268 48.949,14.1 44.432,14.1
  pour cut-out: 48.653,9.714 48.472,9.39 48.472,7.468 48.472,6.218 50.148,6.218 50.148,8.718 50.14,8.727 50.14,9.541 49.967,9.714
  pour cut-out: 48.653,2.343 48.472,2.019 48.472,-1.153 50.148,-1.153 50.148,2.162 49.967,2.343
  pour cut-out: 48.653,-5.028 48.472,-5.352 48.472,-8.524 50.148,-8.524 50.148,-5.209 49.967,-5.028
  pour cut-out: 46.736,-22.962 49.022,-22.851 49.022,-20.523 46.736,-20.371
  pour cut-out: 48.653,-12.408 48.472,-12.732 48.472,-15.904 50.148,-15.904 50.148,-12.589 49.967,-12.408
  pour cut-out: -27.28,-19.253 -22.911,-23.622 -22.911,-27.247 -27.28,-31.719 -27.28,-29.007
  pour cut-out: -27.229,-4.166 -26.975,-4.42 -25.857,-5.537 -25.857,-7.976 -25.908,-7.976 -27.305,-8.865 -27.229,-8.788 -27.229,-3.658
  pour cut-out: -27.229,13.056 -26.975,12.802 -25.857,11.684 -25.857,9.246 -25.908,9.246 -27.305,8.357 -27.229,8.433 -27.229,13.564
  pour cut-out: -26.924,32.715 -26.67,32.461 -25.552,31.344 -25.552,28.905 -25.603,28.905 -27,28.016 -26.924,28.092 -26.924,33.223

## Silkscreen, mask and mechanical layers (free items; w line width, h text height)
Top Overlay:
  text "+" at -47.701,33.807 h0.76
  text "24V+" at -33.325,33.579 h1.14
  text "Jian" at -46.66,33.553 h0.76
  text "*Duo* / 1-2" at 27.134,27.788 h0.64
  text "*Zhutui* / OUT-GND" at 33.994,27.788 h0.64
  text "Cetui / 2-1-G" at 42.93,27.635 h0.64
  text "Load" at 36.848,19.761 h0.64
  text "+" at -47.6,19.228 h0.76
  text "Dabi" at -46.533,18.847 h0.76
  text "3.3 DIO CLK GND" at 29.724,18.491 h0.64
  text "232" at 37.457,16.002 h0.76
  text "T-R-G" at 37.389,14.326 h0.76
  text "G / V / B / A" at 44.755,5.588 h0.76
  text "+" at -47.752,4.597 h0.76
  text "Xiaobi" at -46.736,4.42 h0.76
  text "Jian_" at 42.977,4.42 h0.76
  text "3.3+" at 40.386,3.404 h0.76
  text "Dabi_" at 43.129,-3.099 h0.76
  text "+" at -47.549,-9.677 h0.76
  text "Wan" at -45.872,-9.957 h0.76
  text "Xiaobi_" at 41.961,-10.414 h0.76
  text "Wan_" at 43.637,-17.729 h0.76
  text "5V+" at 40.03,-21.793 h1.14
  text "+" at -47.498,-24.054 h0.76
  text "Zhua" at -46.38,-24.384 h0.76
  text "12+" at -17.069,-43.891 h0.76
  text "24+" at -31.394,-44.044 h0.76
  text "5+" at -2.642,-44.094 h0.76
  text "3-J*/DS*/F2/Tong-GND2/kong0123" at 12.548,-45.771 h0.76
Bottom Overlay:
  text "+" at -20.777,31.826 h0.76
  text "+" at -15.443,31.826 h0.76
  text "+" at -25.502,31.674 h0.76
  text "+" at 43.282,7.645 h0.76
  text "+" at 39.573,4.851 h0.76
  text "+" at -18.999,-33.96 h0.76 r180
  text "+" at -25.451,-34.62 h0.76 r180
  text "+" at -0.508,-37.414 h0.76 r180
  text "+" at -10.312,-41.275 h0.76 r180
  text "+" at -11.938,-41.885 h0.76 r180
  text "+" at -26.518,-42.139 h0.76
Bottom Solder:
  lines w0.25: -49.328,-33.272 -49.328,33.272 ; 52.465,-27.934 52.5,0 52.535,27.934
Mechanical 1:
  lines w0.25: -49.328,-33.272 ccw(c0,0) 52.535,-27.934 ; -49.328,33.272 cw(c0,0) 52.535,27.934
  lines w0.254: -48.006,-54 51.994,-54 51.994,46 -48.006,46 -48.006,-54